# Altium PCB PCB1.PcbDoc
Units mil, origin at the board's own origin, x right, y up, seen from the top; angles counter-clockwise.
Board outline 2644.64 x 2644.64 mil, 2 copper layers (Top Layer, Bottom Layer); 27 components, 25 nets, 160 pads, 18 vias.
Unrouted connection lines stored in the file: 7.
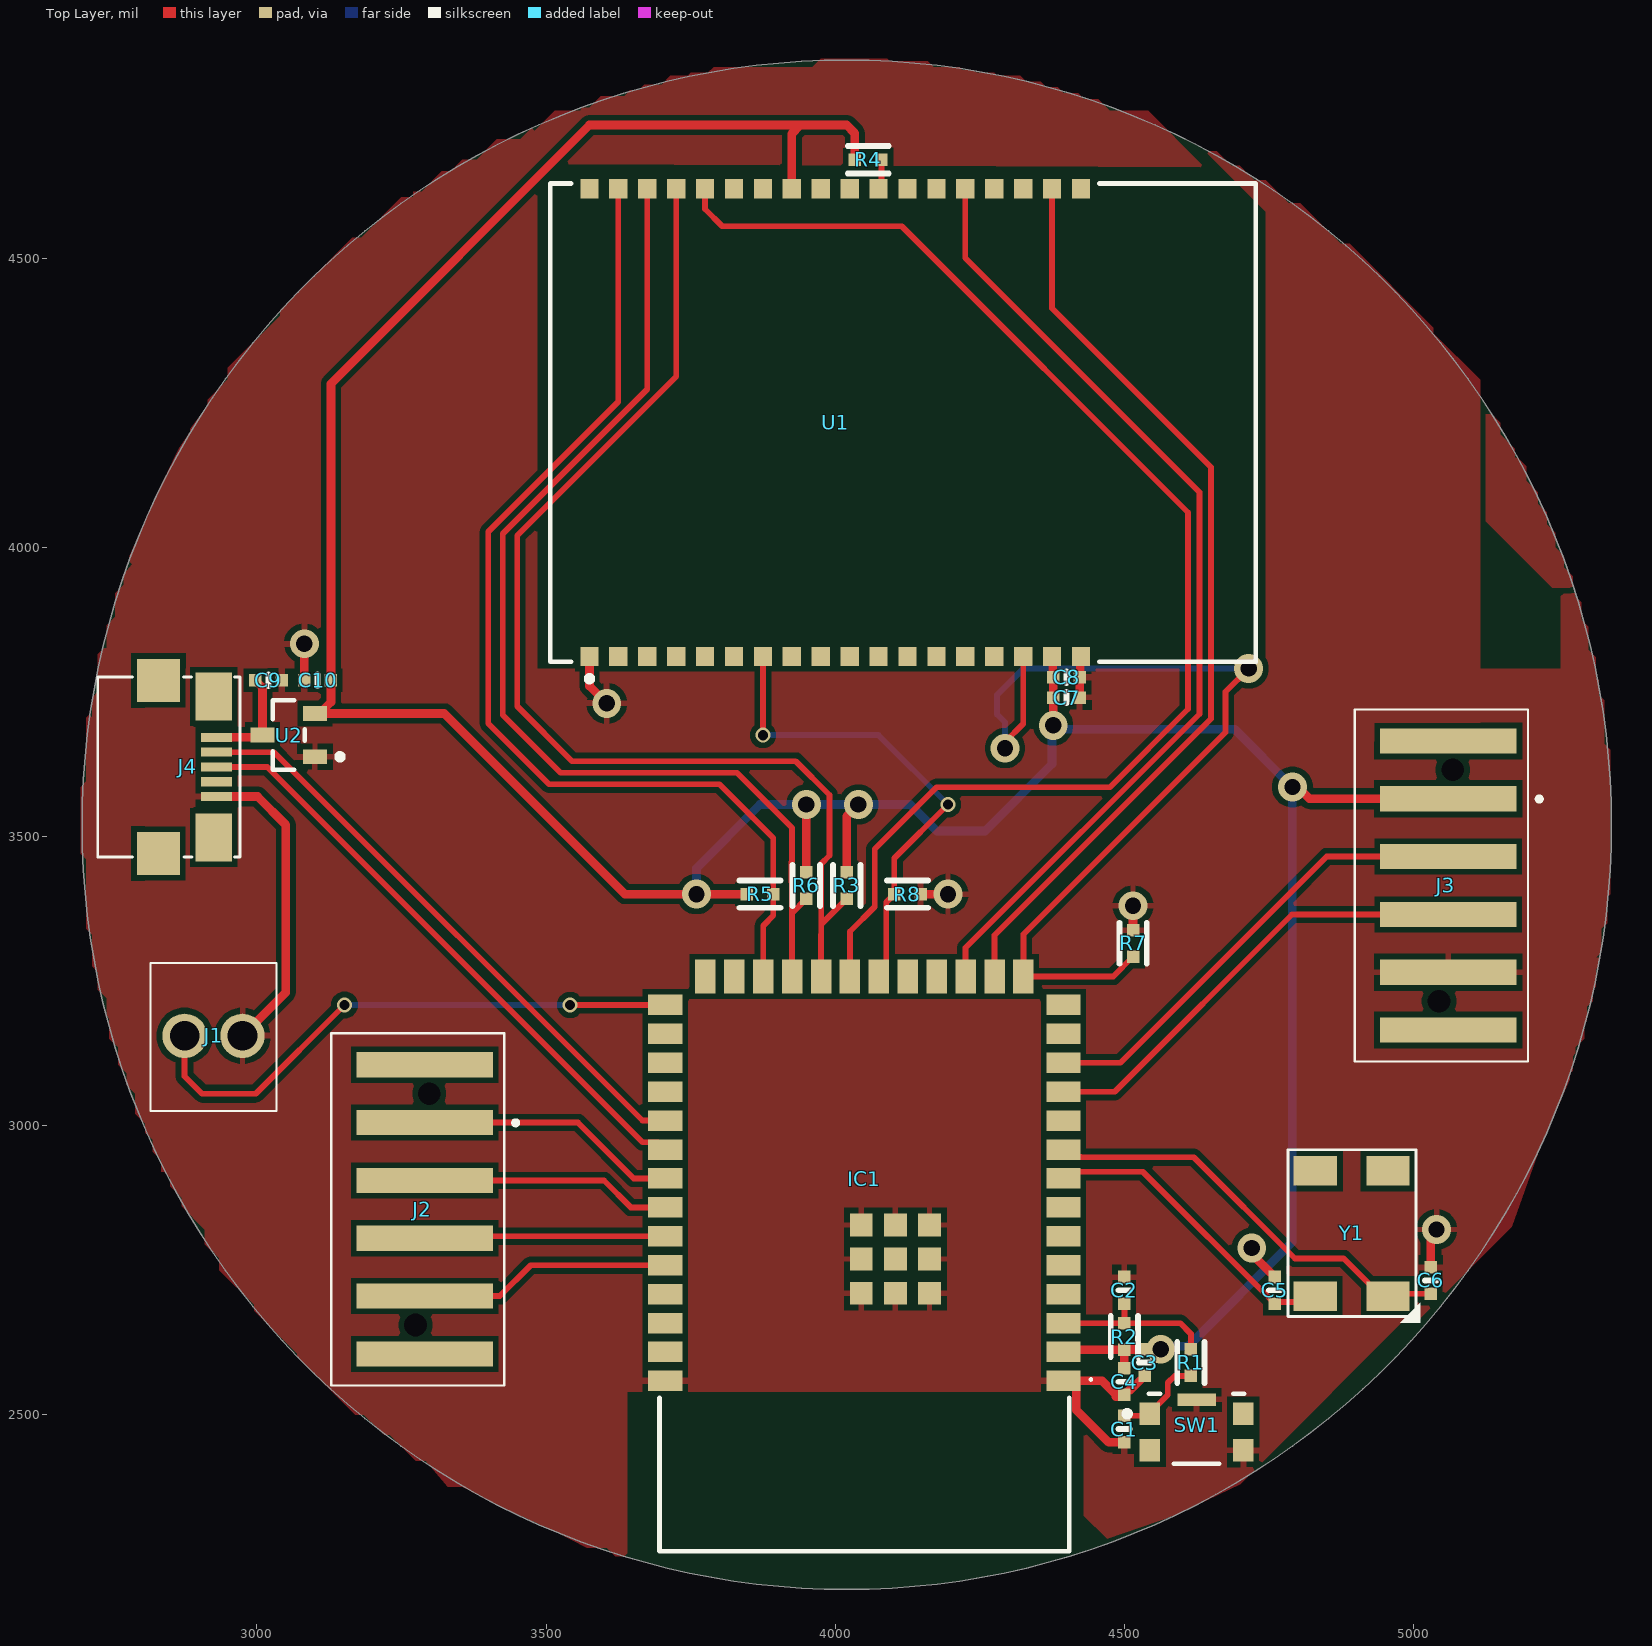
[diagram p0: Top Layer view]
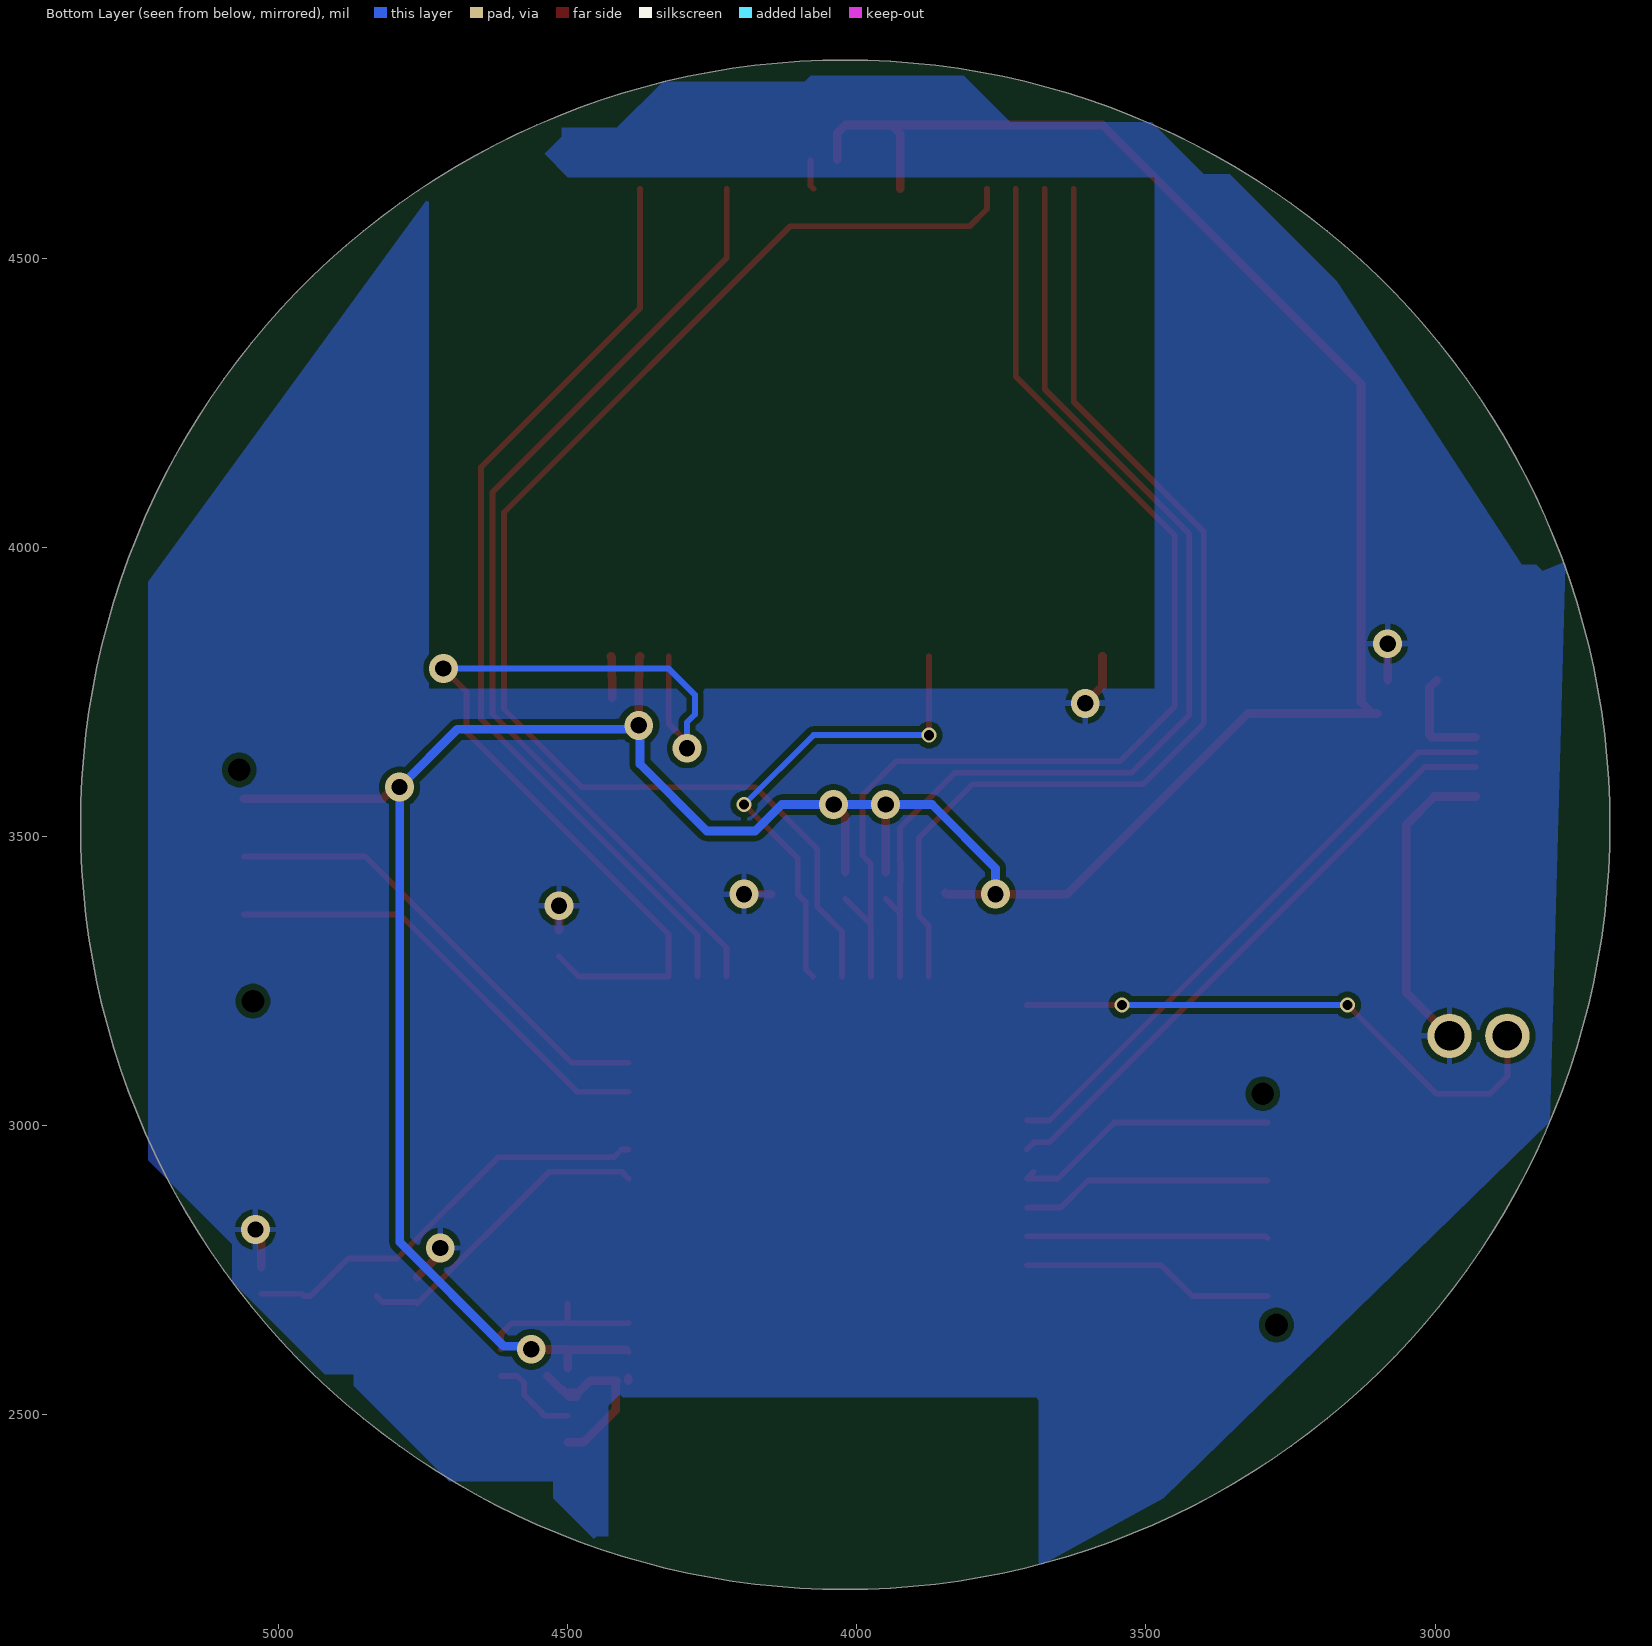
[diagram p1: Bottom Layer view, seen from below]
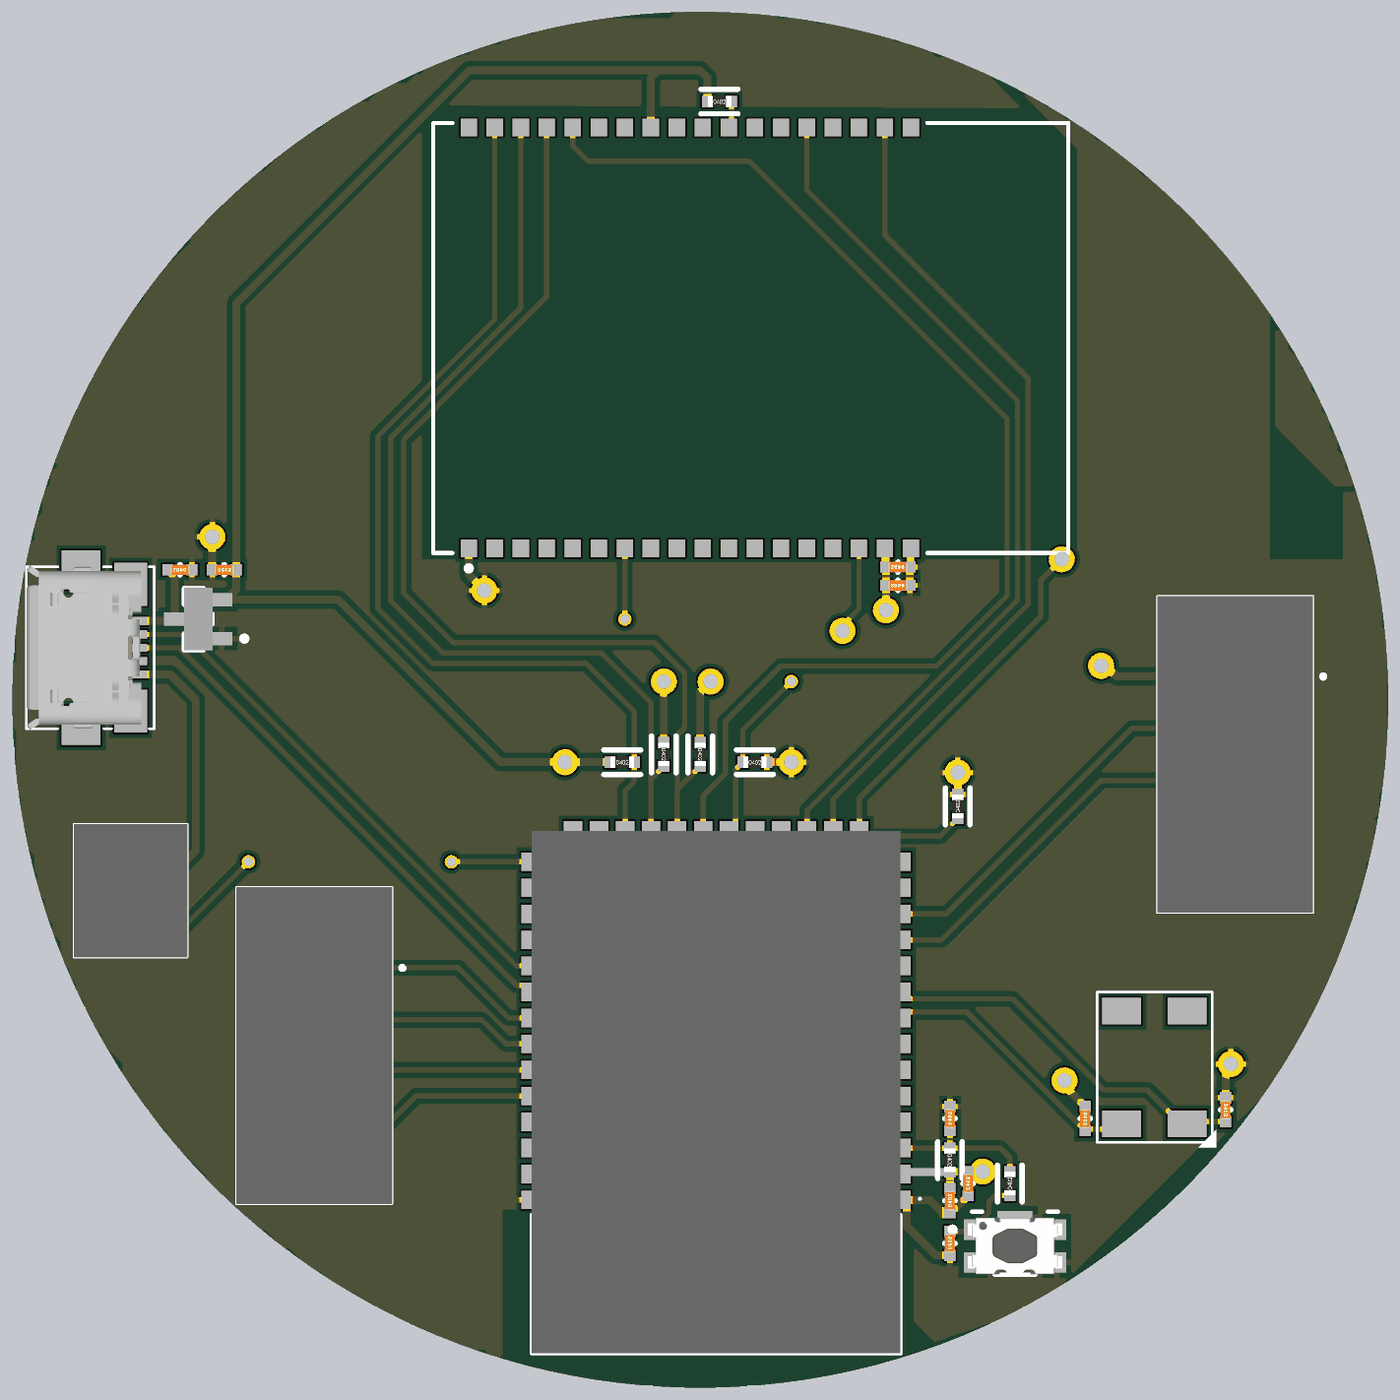
[diagram p2: 3D render of the assembled board from above, using the file's embedded part models]

## Layer stack, top to bottom
Top Solder: solder mask 0.4, Solder Resist, Dk 3.5
Top Layer: signal copper 1.4
Dielectric 1: dielectric 12.6, FR-4, Dk 4.8
Bottom Layer: signal copper 1.4
Bottom Solder: solder mask 0.4, Solder Resist, Dk 3.5

## Board outline
2697.68,3520 ccw(c4020,3520) 4020,2197.68 ccw(c4020,3520) 5342.32,3520 ccw(c4020,3520) 4020,4842.32 ccw(c4020,3520)

## Design rules (kind name [scope] priority, off if disabled: settings)
Clearance [All] p1: gap=10 ignorepadtopadclearanceinfootprint=TRUE except(0: Arc-Hole Track-Hole SMDPad-Hole THPad-Hole Via-Hole Fill-Hole Poly-Hole Region-Hole Text-Hole)
PolygonConnect [All] p1: connectstyle=Relief reliefconductorwidth=10 reliefentries=4 polygonreliefangle="90 Angle" airgapwidth=10
RoutingVias [All] p1: holewidth=28 width=50 viastyle="Through Hole" minholewidth=9.84 minwidth=17.72 maxholewidth=28 maxwidth=50
SolderMaskExpansion [All] p1: expansion=4 istentingtop=FALSE
Width [All] p1: maxlimit=40 minlimit=6 preferedwidth=10 minimp=50.000000 maximp=50.000000 favimp=50.000000
30 further rules are at their usual default settings.

## Components (designator, comment, footprint, x,y, rotation, side; value= is the part's Value field where it differs from the comment)
C1 "0.10µF" SMD-0402C 4500,2475 r0 top
C2 "0.10µF" SMD-0402C 4500,2715 r0 top
C3 "22uF" SMD-0402C 4535,2590 r0 top value=2200pF
C4 "0.10µF" SMD-0402C 4500,2557 r0 top
C5 "20pF" SMD-0402C 4760,2715 r180 top
C6 "20pF" SMD-0402C 5030,2732 r180 top
C7 "10pF" SMD-0402C 4400,3740 r90 top
C8 "10pF" SMD-0402C 4400,3775 r90 top
C9 "1µF" SMD-0402C 3020,3770 r90 top
C10 "1µF" SMD-0402C 3105,3770 r270 top
IC1 "ESP32-S3-WROOM-2-N32R8V" ESP32S3WROOM2N32R8V 4050.51,2765.51 r180 top
J1 "VN02A1500000G" VN02A1500000G 2875,3155 r0 top
J2 "XW4K-04A1-H1" XW4K04A1H1 3290,2855 r270 top
J3 "XW4K-04A1-H1" XW4K04A1H1 5060,3415 r270 top
J4 "USB MICRO-B" CON_10118192-0001LF_SMD 2880,3620 r270 top (schematic designator J?)
R1 "0.0" SMD-0402-RES 4615,2590 r0 top
R2 "10k" SMD-0402-RES 4500,2635 r180 top
R3 "4.7k" SMD-0402-RES 4020,3415 r180 top
R4 "4.7k" SMD-0402-RES 4057,4670 r270 top
R5 "4.7k" SMD-0402-RES 3870,3400 r270 top
R6 "4.7k" SMD-0402-RES 3950,3415 r180 top
R7 "4.7k" SMD-0402-RES 4515,3315 r0 top
R8 "4.7k" SMD-0402-RES 4125,3400 r270 top
SW1 "KMR231GLFS" FP-KMR231GLFS-MFG 4625,2470 r0 top
U1 "MRF24WG0MA-I/RM" MCHP-MODULE-36_V 4000,4215.47 r90 top
U2 "MCP1799T-3302H/TT" FP-C04-104-MFG 3055,3675 r180 top
Y1 "MC-405 32.7680K-G3" XTAL_125_74X51_SMD 4955.98,2705 r90 top

## Footprints (in the part's own frame and the unit in brackets; to place one, negate y for a bottom-side part, rotate by r counter-clockwise, add the part's x,y. Pads: shape width x height; smd on the part's side, far side on the other; paste and mask are expansions set on the pad)
CON_10118192-0001LF_SMD [mm] "USB2.0 MICRO"
  rect 0.4x1.35 smd: 1(-1.3,1.275) 2(-0.65,1.275) 3(0,1.275) 4(0.65,1.275) 5(1.3,1.275)
  rect 2.1x1.6 smd: 6(-3.1,1.15) 7(3.1,1.15)
  rect 1.9x1.9 smd: 8(-3.8,-1.275) 9(3.8,-1.275)
  silkscreen extent -3.95,-3.94 3.95,2.3, body extent -4.04,-3.94 4.04,1.66, height 2.81
ESP32S3WROOM2N32R8V [mm]
  rect 1.5x0.9 smd: 1(-8.75,5.26) 2(-8.75,3.99) 3(-8.75,2.72) 4(-8.75,1.45) 5(-8.75,0.18) 6(-8.75,-1.09) 7(-8.75,-2.36) 8(-8.75,-3.63) 9(-8.75,-4.9) 10(-8.75,-6.17) 11(-8.75,-7.44) 12(-8.75,-8.71) 13(-8.75,-9.98) 14(-8.75,-11.25) 27(8.75,-11.25) 28(8.75,-9.98) 29(8.75,-8.71) 30(8.75,-7.44) 31(8.75,-6.17) 32(8.75,-4.9) 33(8.75,-3.63) 34(8.75,-2.36) 35(8.75,-1.09) 36(8.75,0.18) 37(8.75,1.45) 38(8.75,2.72) 39(8.75,3.99) 40(8.75,5.26)
  rect 0.9x1.5 smd: 15(-6.985,-12.5) 16(-5.715,-12.5) 17(-4.445,-12.5) 18(-3.175,-12.5) 19(-1.905,-12.5) 20(-0.635,-12.5) 21(0.635,-12.5) 22(1.905,-12.5) 23(3.175,-12.5) 24(4.445,-12.5) 25(5.715,-12.5) 26(6.985,-12.5)
  rect 1x1 smd: 41(-1.36,-0.09) 42(-1.36,1.41) 43(-2.86,1.41) 44(-2.86,-0.09) 45(-2.86,-1.59) 46(-1.36,-1.59) 47(0.14,-1.59) 48(0.14,-0.09) 49(0.14,1.41)
  silkscreen extent -10,5.15 9,12.75, body extent -9,-12.75 9,12.75, height 3.35
FP-C04-104-MFG [mm]
  rect 1.05x0.65 smd paste+0 mask+0: 1(-1.15,0.95) 2(-1.15,-0.95) 3(1.15,0)
  silkscreen extent -2.38,-1.53 0.7,1.52, body extent -1.78,-1.88 1.77,1.88, height 0.25
FP-KMR231GLFS-MFG [mm]
  rect 0.9x1 smd paste+0 mask+0: 1(-2.05,0.8) 2(2.05,0.8) 3(-2.05,-0.8) 4(2.05,-0.8)
  rect 1.7x0.55 smd paste+0 mask+0: 5(0,1.425)
  silkscreen extent -3.17,-1.4 2.1,1.68, body extent -2.6,-1.5 2.6,1.8, height 0.25
MCHP-MODULE-36_V [mm] "Module, 36-Leads, Body 31x21mm, Pitch 1.27mm"
  rect 0.85x0.8 smd: 1(-10.275,10.795) 2(-10.275,9.525) 3(-10.275,8.255) 4(-10.275,6.985) 5(-10.275,5.715) 6(-10.275,4.445) 7(-10.275,3.175) 8(-10.275,1.905) 9(-10.275,0.635) 10(-10.275,-0.635) 11(-10.275,-1.905) 12(-10.275,-3.175) 13(-10.275,-4.445) 14(-10.275,-5.715) 15(-10.275,-6.985) 16(-10.275,-8.255) 17(-10.275,-9.525) 18(-10.275,-10.795) 19(10.275,-10.795) 20(10.275,-9.525) 21(10.275,-8.255) 22(10.275,-6.985) 23(10.275,-5.715) 24(10.275,-4.445) 25(10.275,-3.175) 26(10.275,-1.905) 27(10.275,-0.635) 28(10.275,0.635) 29(10.275,1.905) 30(10.275,3.175) 31(10.275,4.445) 32(10.275,5.715) 33(10.275,6.985) 34(10.275,8.255) 35(10.275,9.525) 36(10.275,10.795)
  silkscreen extent -11.37,-18.47 10.5,12.52, body extent -10.5,-18.47 10.5,12.52, height 2.7
SMD-0402-RES [mm]
  rect 0.55x0.55 smd: 1(0,0.584) 2(0,-0.584)
  silkscreen extent -0.6,-0.9 0.6,0.9, body extent -0.28,-0.57 0.27,0.58, height 0.41
SMD-0402C [mm]
  rect 0.55x0.55 smd: 1(0,0.584) 2(0,-0.584)
  silkscreen extent -0.25,0 0.25,0, body extent -0.25,-0.51 0.25,0.51, height 0.51
VN02A1500000G [mm]
  round 1.95 hole 1.3: 1(0,0) 2(2.54,0)
  silkscreen extent -1.5,-3.3 4.04,3.2, body extent -1.5,-3.3 4.04,3.2, height 8.6
XTAL_125_74X51_SMD [mm]
  rect 1.3x1.9 smd: 1(0,0) 2(5.5,0) 3(5.5,3.2) 4(0,3.2)
  silkscreen extent -1.17,-1.42 6.43,4.39, body extent -0.9,-1.22 6.43,4.39, height 2.54
XW4K04A1H1 [mm]
  rect 1.1x6 smd: 1(-3.81,0) 2(-1.27,0) 3(1.27,0) 4(3.81,0) MP1(-6.35,0) MP2(6.35,0)
  round 0.5 hole 1 unplated: MB1(-5.08,0.2) MB2(5.08,-0.4)
  silkscreen extent -7.74,-4.1 7.74,4.1, body extent -7.74,-4.1 7.74,3.5, height 5.1

## Part data
C1 C2 C4: library part GRM152C80J104ME19D, "CAP CER 0.1UF 6.3V X6S 0402", Digi-Key Part Number=490-9998-1-ND, Manufacturer="Murata Electronics North America", Operating Temperature="-55°C ~ 105°C", Package / Case="0402 (1005 Metric)", Ratings=-, Temperature Coefficient=X6S, Tolerance=±20%, Voltage=6.3V, @ qty=0, Applications="General Purpose", Datasheets=http://www.murata.com/~/media/webrenewal/support/library/catalog/products/capacitor/mlcc/c02e.pdf, Factory Stock=0, Features="Derating Recommended", Height - Seated (Max)=-, Image=//media.digikey.com/Renders/Murata%20Renders/ZRB-SERIES-0402.jpg, Lead Spacing=-, Lead Style=-, Minimum Quantity=1, Mounting Type="Surface Mount, MLCC", Packaging="Cut Tape (CT)", Part Number=GRM152C80J104ME19D, Part Status=Active, Quantity Available=19095, Series=GRM, Size / Dimension="0.039\" L x 0.020\" W (1.00mm x 0.50mm)", Thickness (Max)="0.009\" (0.22mm)", Unit Price (USD)=0.15
C3: library part GCM155R71H222KA37D, "CAP CER 2200PF 50V X7R 0402", Digi-Key Part Number=490-4914-1-ND, Manufacturer="Murata Electronics North America", Operating Temperature="-55°C ~ 125°C", Package / Case="0402 (1005 Metric)", Ratings=AEC-Q200, Temperature Coefficient=X7R, Tolerance=±10%, Voltage=50V, @ qty=0, Applications=Automotive, Datasheets=http://www.murata.com/~/media/webrenewal/support/library/catalog/products/capacitor/mlcc/c03e.ashx, Factory Stock=0, Features=-, Height - Seated (Max)=-, Image=//media.digikey.com/Renders/Murata%20Renders/ZRB-SERIES-0402.jpg, Lead Spacing=-, Lead Style=-, Minimum Quantity=1, Mounting Type="Surface Mount, MLCC", Packaging="Cut Tape (CT)", Part Number=GCM155R71H222KA37D, Part Status=Active, Quantity Available=56459, Series=GCM, Size / Dimension="0.039\" L x 0.020\" W (1.00mm x 0.50mm)", Thickness (Max)="0.022\" (0.55mm)", Unit Price (USD)=0.1
C5 C6: library part GRM1555C1E200JA01D, "CAP CER 20PF 25V NP0 0402", Digi-Key Part Number=490-11364-1-ND, Manufacturer="Murata Electronics North America", Operating Temperature="-55°C ~ 125°C", Package / Case="0402 (1005 Metric)", Ratings=-, Temperature Coefficient="C0G, NP0", Tolerance=±5%, Voltage=25V, @ qty=0, Applications="General Purpose", Datasheets=http://www.murata.com/~/media/webrenewal/support/library/catalog/products/capacitor/mlcc/c02e.pdf, Factory Stock=0, Features=-, Height - Seated (Max)=-, Image=//media.digikey.com/Renders/Murata%20Renders/ZRB-SERIES-0402.jpg, Lead Spacing=-, Lead Style=-, Minimum Quantity=1, Mounting Type="Surface Mount, MLCC", Packaging="Cut Tape (CT)", Part Number=GRM1555C1E200JA01D, Part Status=Active, Quantity Available=18664, Series=GRM, Size / Dimension="0.039\" L x 0.020\" W (1.00mm x 0.50mm)", Thickness (Max)="0.022\" (0.55mm)", Unit Price (USD)=0.1
C7 C8: library part GJM1555C1H100GB01D, "CAP CER 10PF 50V NP0 0402", Digi-Key Part Number=490-8077-1-ND, Manufacturer="Murata Electronics North America", Operating Temperature="-55°C ~ 125°C", Package / Case="0402 (1005 Metric)", Ratings=-, Temperature Coefficient="C0G, NP0", Tolerance=±2%, Voltage=50V, @ qty=0, Applications="RF, Microwave, High Frequency", Datasheets=http://www.murata.com/~/media/webrenewal/support/library/catalog/products/capacitor/mlcc/c02e.pdf, Factory Stock=0, Features="High Q, Low Loss", Height - Seated (Max)=-, Image=//media.digikey.com/Renders/Murata%20Renders/ZRB-SERIES-0402.jpg, Lead Spacing=-, Lead Style=-, Minimum Quantity=1, Mounting Type="Surface Mount, MLCC", Packaging="Cut Tape (CT)", Part Number=GJM1555C1H100GB01D, Part Status=Active, Quantity Available=54586, Series=GJM, Size / Dimension="0.039\" L x 0.020\" W (1.00mm x 0.50mm)", Thickness (Max)="0.022\" (0.55mm)", Unit Price (USD)=0.18
C9 C10: library part GRM155C81E105KE11D, "CAP CER 1UF 25V X6S 0402", Digi-Key Part Number=490-10014-1-ND, Manufacturer="Murata Electronics North America", Operating Temperature="-55°C ~ 105°C", Package / Case="0402 (1005 Metric)", Ratings=-, Temperature Coefficient=X6S, Tolerance=±10%, Voltage=25V, @ qty=0, Applications="General Purpose", Datasheets=http://www.murata.com/~/media/webrenewal/support/library/catalog/products/capacitor/mlcc/c02e.pdf, Factory Stock=0, Features="Derating Recommended", Height - Seated (Max)=-, Image=//media.digikey.com/Renders/Murata%20Renders/ZRB-SERIES-0402.jpg, Lead Spacing=-, Lead Style=-, Minimum Quantity=1, Mounting Type="Surface Mount, MLCC", Packaging="Cut Tape (CT)", Part Number=GRM155C81E105KE11D, Part Status=Active, Quantity Available=85432, Series=GRM, Size / Dimension="0.039\" L x 0.020\" W (1.00mm x 0.50mm)", Thickness (Max)="0.022\" (0.55mm)", Unit Price (USD)=0.29
IC1: "Integrated Circuit", Manufacturer_Name="Espressif Systems", Mouser Part Number=356-ESP3S3WRM2N32R8V, Datasheet Link=https://www.espressif.com/sites/default/files/documentation/esp32-s3-wroom-2_datasheet_en.pdf, Height=3.25mm, Manufacturer_Part_Number=ESP32-S3-WROOM-2-N32R8V, Mouser Price/Stock=https://www.mouser.co.uk/ProductDetail/Espressif-Systems/ESP32-S3-WROOM-2-N32R8V?qs=Li%252BoUPsLEntC3FaT%2FvCeug%3D%3D
J1: "Connector", Manufacturer_Name=Amphenol, Mouser Part Number=649-VN02A15000J0G, Arrow Part Number=VN02A1500000G, Arrow Price/Stock=https://www.arrow.com/en/products/vn02a1500000g/amphenol?region=nac, Datasheet Link=https://www.mouser.com/datasheet/2/18/9COuFx9FNOAv-1379191.pdf, Height=8.5mm, Manufacturer_Part_Number=VN02A1500000G, Mouser Price/Stock=https://www.mouser.co.uk/ProductDetail/Amphenol-Anytek/VN02A1500000G?qs=Mv7BduZupUgf8d3Xo6xdxw%3D%3D
J2 J3: "Connector", Manufacturer_Name="Omron Electronics", Mouser Part Number=653-XW4K04A1H1, Datasheet Link=http://omronfs.omron.com/en_US/ecb/products/pdf/en_xw4h_k_l.pdf, Height=5mm, Manufacturer_Part_Number=XW4K-04A1-H1, Mouser Price/Stock=https://www.mouser.co.uk/ProductDetail/Omron-Electronics/XW4K-04A1-H1?qs=wYonFgBYHKkbSWPseQWu%252BA%3D%3D
J4: library part CON_USB2.0_MICROB-SMD, "USB - micro B USB 2.0 Receptacle Connector 5 Position Surface Mount, Right Angle", Alternate Part Number-1=NA, Case/Package="USB MICRO-B SMD", Manufacturer=ICC, Manufacturer Part Number=10118192-0001LF, Supplier Part Number-1="MICRO USB", Supplier-1=SUNROM
R1: library part ERJ-2GE0R00X, "RES SMD 0.0OHM JUMPER 1/10W 0402", Digi-Key Part Number=P0.0JCT-ND, Manufacturer="Panasonic Electronic Components", Operating Temperature="-55°C ~ 155°C", Package / Case="0402 (1005 Metric)", Power (Watts)="0.1W, 1/10W", Supplier Device Package=0402, Temperature Coefficient=-, Tolerance=Jumper, @ qty=1500, Composition="Thick Film", Datasheets=http://industrial.panasonic.com/www-cgi/jvcr13pz.cgi?E+PZ+3+AOA0001+ERJ2GE0R00X+7+WW, Factory Stock=0, Failure Rate=-, Features="Automotive AEC-Q200", Height - Seated (Max)="0.016\" (0.40mm)", Image=//media.digikey.com/Photos/Panasonic%20Photos/ERJ-PA2-Series.jpg, Minimum Quantity=1, Number of Terminations=2, Packaging="Cut Tape (CT)", Part Number=ERJ-2GE0R00X, Part Status=Active, Quantity Available=3152483, Series=ERJ, Size / Dimension="0.039\" L x 0.020\" W (1.00mm x 0.50mm)", Unit Price (USD)=0.00384
R2: library part ERJ-2GEJ103X, "RES SMD 10K OHM 5% 1/10W 0402", Digi-Key Part Number=P10KJCT-ND, Manufacturer="Panasonic Electronic Components", Operating Temperature="-55°C ~ 155°C", Package / Case="0402 (1005 Metric)", Power (Watts)="0.1W, 1/10W", Supplier Device Package=0402, Temperature Coefficient=±200ppm/°C, Tolerance=±5%, @ qty=1500, Composition="Thick Film", Datasheets=http://industrial.panasonic.com/www-cgi/jvcr13pz.cgi?E+PZ+3+AOA0001+ERJ2GEJ103X+7+WW, Factory Stock=0, Failure Rate=-, Features="Automotive AEC-Q200", Height - Seated (Max)="0.016\" (0.40mm)", Image=//media.digikey.com/Photos/Panasonic%20Photos/ERJ-PA2-Series.jpg, Minimum Quantity=1, Number of Terminations=2, Packaging="Cut Tape (CT)", Part Number=ERJ-2GEJ103X, Part Status=Active, Quantity Available=2560215, Series=ERJ, Size / Dimension="0.039\" L x 0.020\" W (1.00mm x 0.50mm)", Unit Price (USD)=0.00350
R3 R4 R5 R6 R7 R8: library part ERJ-2GEJ472X, "RES SMD 4.7K OHM 5% 1/10W 0402", Digi-Key Part Number=P4.7KJCT-ND, Manufacturer="Panasonic Electronic Components", Operating Temperature="-55°C ~ 155°C", Package / Case="0402 (1005 Metric)", Power (Watts)="0.1W, 1/10W", Supplier Device Package=0402, Temperature Coefficient=±200ppm/°C, Tolerance=±5%, @ qty=1500, Composition="Thick Film", Datasheets=http://industrial.panasonic.com/www-cgi/jvcr13pz.cgi?E+PZ+3+AOA0001+ERJ2GEJ472X+7+WW, Factory Stock=0, Failure Rate=-, Features="Automotive AEC-Q200", Height - Seated (Max)="0.016\" (0.40mm)", Image=//media.digikey.com/Photos/Panasonic%20Photos/ERJ-PA2-Series.jpg, Minimum Quantity=1, Number of Terminations=2, Packaging="Cut Tape (CT)", Part Number=ERJ-2GEJ472X, Part Status=Active, Quantity Available=8551774, Series=ERJ, Size / Dimension="0.039\" L x 0.020\" W (1.00mm x 0.50mm)", Unit Price (USD)=0.00350
SW1: library part CMP-2000-06516-3, "SWITCH TACTILE SPST-NO 0.05A 32V", Case/Package=SMD/SMT, Contact Current Rating=50mA, Contact Resistance=100mR, Insulation Resistance=1GR, Max Operating Temperature=85°C, Max Voltage Rating (DC)=32V, Min Operating Temperature=-40°C, Operating Force=3N, Package Quantity=7000, Power Rating=1W, Actuator Length=0.5mm, Actuator Type=Standard, Contact Material=Silver, Contact Plating=Silver, Current Rating=50mA, Depth=4.6mm, Illumination Type=Non-Illuminated, Lead Free="Lead Free", Length=4.6mm, Max Current Rating=50mA, Mechanical Life=150000Cycles, Mount="Surface Mount", Orientation=Straight, Packaging="Cut Tape", Radiation Hardening=No, REACH SVHC="No SVHC", Series=KMR2, Switch Function=Off-Mom, Switch Travel=0.25mm, Termination="Gull Wing", Throw Configuration=SPST, Voltage Rating (DC)=32V, Width=2.8mm
U1: library part CMP-0191-00102-1, "IEEE 802.11-Compliant RF Transceiver, 2.8 to 3.6 V, -40 to 85 degC, 36-Pin Module, RoHS, Tray", Temperature Max="85 degC", Temperature Min="-40 degC", ComponentLink1Description="Manufacturer URL", ComponentLink1URL=http://www.microchip.com/, ComponentLink2Description=Datasheet, ComponentLink2URL=http://ww1.microchip.com/downloads/en/DeviceDoc/70686B.pdf, DatasheetVersion="Rev. B", Mounting Technology="Surface Mount", PackageDescription="36-Pin Module, Body 31 x 21 mm, Pitch 1.27 mm", Packing=Tray, PartNumber=MRF24WG0MA-I/RM, RoHS=TRUE, VDD Max="3.6 V", VDD Min="2.8 V"
U2: library part CMP-06324-000112-1, "IC REG LINEAR 3.3V 80MA SOT23-3"
Y1: library part "XTAL_32.768K-MC-405 32.7680K-G3", "32.768kHz ±100ppm Crystal 20pF 50 kOhms 4-SOJ, 5.50mm pitch", Alternate Part Number-1="MC-405 32.7680K-AC0: ROHS", Case/Package=4-SOJ, Manufacturer=EPSON, Supplier Part Number-1=732-MC405327680KG3RS, Manufacturer Part Number="MC-405 32.7680K-G3", Supplier-1=Mouser

## Via types
v1: diameter 50, hole 28, Top Layer to Bottom Layer, 14 vias
v2: diameter 25.59, hole 17.72, Top Layer to Bottom Layer, 4 vias

## Nets (pads, with @x,y where several pads share a name; then routed paths per layer and width w, separated by ;. In a path a pad name is that pad's centre, name@x,y a point inside that pad or via, vN(x,y) a via of type N, cw(c..) or ccw(c..) an arc to the next point about the centre after c; other vN are vias at no path point)
3.3V: C3.1 C4.1 C7.1 C8.1 C10.1 IC1.2 J3.1 R2.1 R3.2 R4.2 R5.2 R6.2 U1.17 U1.29 U2.2 | length 5929
  Top Layer w10: IC1.2 IC1.2@4398.57,2612
  Top Layer w15: U2.2 U2.2@3108.15,3712.4 ; R5.2@3846.83,3402.26 3844.57,3400 v1(3760,3400) 3636.42,3400 3324.02,3712.4 U2.2@3108.15,3712.4 ; U1.29 3925,4715 3940,4730 ; R6.2 v1(3950,3555) ; R3.2 4020,3535 v1(4040,3555) ; R4.2 4034,4716 4020,4730 3940,4730 ; U1.17 4376,3809.95 4376,3776 C8.1 C7.1 v1(4377,3692) ; IC1.2@4398.57,2612 R2.1 ; C4.1 R2.1 ; v1(4563,2613) C3.1 4534.5,2612.5 4500.5,2612.5 R2.1 ; v1(4790.5,3585.24) 4799.97,3585.24 4820.2,3565 J3.1 ; U2.2@3108.15,3712.4 3128,3732.25 C10.1 3128,4282.77 3575.23,4730 3940,4730
  Bottom Layer w15: v1(3760,3400) 3760,3445 3870,3555 v1(3950,3555) v1(4040,3555) 4130,3555 4175.63,3509.37 4259.37,3509.37 4375,3625 v1@4375,3676.23 ; v1(4377,3692) 4383.7,3685.3 4414.72,3685.3 4415,3685.02 4690.71,3685.02 v1(4790.5,3585.24) 4790.5,2798.39 4610.5,2618.4 4568.4,2618.4 v1(4563,2613)
!CS: IC1.17 U1.23 | length 1697.7
  Top Layer w10: U1.23 4225,4500 4630,4095 4630,3711.72 4225.51,3307.23 IC1.17
!RST: IC1.20 R8.2 U1.7 | length 852.5
  Top Layer w10: v2(3875,3675) U1.7 ; IC1.20 4088.23,3270.35 4088.23,3386.23 R8.2 4102,3462 v2(4195,3555)
  Bottom Layer w10: v2(3875,3675) 4075,3675 v2(4195,3555)
!WP: IC1.15 R7.2 U1.16 | length 1620.9
  Top Layer w10: v1(4293.51,3652.39) 4293.51,3663.21 4325,3694.7 U1.16 ; R7.2 4480.64,3257.64 IC1.15 4325.51,3330.51 4675,3680 4675,3750 v1(4715,3790)
  Bottom Layer w10: v1(4293.51,3652.39) 4293.51,3697.35 4280,3710.86 4280,3745 4325,3790 v1(4715,3790)
EN: C2.2 IC1.3 R1.1 R2.2 | length 288.6
  Top Layer w10: IC1.3 4395.43,2658 R2.2 ; C2.2 R2.2 ; R1.1 4615,2640 4597,2658 R2.2
GND: C1.2 C2.1 C3.2 C4.2 C5.2 C6.2 C7.2 C8.2 C9.2 C10.2 IC1.1 IC1.40 IC1.41 IC1.42 IC1.43 IC1.44 IC1.45 IC1.46 IC1.47 IC1.48 IC1.49 J1.2 J3.4 J4.5 R7.1 R8.1 SW1.4 SW1.5 U1.1 U1.10 U1.18 U1.19 U1.25 U1.28 U1.30 U1.36 U2.1 | length 1313.5
  Top Layer w15: J4.5 3001.18,3568.82 3050,3520 3050,3230 J1.2 ; C10.2 v1(3082,3833) ; U1.1 3575,3760 v1(3605,3730) ; R8.1 v1(4195,3400) ; IC1.1 IC1.1@4395,2563.43 ; C7.2 C8.2 4424,3776 4424,3809.95 U1.18 ; 4485.67,2530.67 4496.67,2530.67 C4.2 ; C1.2 4473,2452 4417.03,2507.97 4417.03,2556.4 4415,2558.43 4461.21,2558.43 4482.31,2537.33 4496.67,2537.33 C4.2 ; R7.1 v1(4515,3380) ; C3.2 4510.46,2542.46 4508.46,2542.46 C4.2 ; v1@4718.57,2790 v1(4720.28,2788.28) 4726.98,2781.59 4726.98,2771.02 C5.2 ; C6.2 5030,2810 v1(5040,2820)
HIB: IC1.16 U1.20 | length 1631.4
  Top Layer w10: IC1.16 4275.51,3328.94 4650,3703.43 4650,4138.28 4375,4413.28 U1.20
INT1: IC1.22 R3.1 U1.33 | length 1994.9
  Top Layer w10: U1.33 3725,4295 3450,4020 3450,3725 3545,3630 3931.57,3630 3990,3571.57 3990,3466.78 3975.83,3452.61 3975.83,3347.83 ; IC1.22 3975.51,3330 3975.83,3330.32 3975.83,3347.83 ; R3.1 3975.83,3347.83
IO0: IC1.27 J1.1 | length 977
  Top Layer w10: J1.1 2875,3085 2905,3055 2998.15,3055 v2(3151.57,3208.43) ; v2(3541.57,3208.43) IC1.27
  Bottom Layer w10: v2(3151.57,3208.43) v2(3541.57,3208.43)
NetC1_1: C1.1 R1.2 SW1.1 | length 156.9
  Top Layer w10: C1.1 4540.8,2498 SW1.1 4544.29,2503.46 4575,2534.17 4575,2555 4587,2567 R1.2
NetC5_1: C5.1 IC1.8 Y1.4 | length 538.4
  Top Layer w10: IC1.8 4406.57,2920 4532,2920 C5.1 ; C5.1@4760,2695 4820,2695 Y1.4
NetC6_1: C6.1 IC1.9 Y1.1 | length 741.6
  Top Layer w10: IC1.9 4406.81,2958.43 4419.53,2945.71 4424.68,2945.71 4425.39,2945 4620.14,2945 4795.14,2770 4879.17,2770 4944.17,2705 Y1.1 4959.98,2709 C6.1
NetR4_1: R4.1 U1.26 | length 52.1
  Top Layer w10: U1.26 4080,4625 R4.1
RX: IC1.11 J3.3 | length 792
  Top Layer w10: IC1.11 4483.43,3058.43 4790,3365 J3.3
SCK1: IC1.23 R6.1 U1.34 | length 1887.6
  Top Layer w10: U1.34 3675,4273.28 3425,4023.28 3425,3710 3525,3610 3830,3610 3925.51,3514.49 3925.51,3456.38 3924.17,3455.04 3924.17,3420.96 3925.51,3419.62 3925.51,3367.51 ; IC1.23 3925.51,3367.51 ; R6.1 3925.51,3367.51
SDI1: IC1.24 R5.1 U1.35 | length 1839.8
  Top Layer w10: U1.35 3625,4251.57 3400,4026.57 3400,3695 3505,3590 3800,3590 3893,3497 R5.1 3893,3363 3875.51,3345.51 IC1.24
SDO1: IC1.21 U1.32 | length 2307.8
  Top Layer w10: U1.32 3775,4584.76 3804.76,4555 4115,4555 4610,4060 4610,3720 4475,3585 4175,3585 4068.23,3478.23 4068.23,3378.23 4025.51,3335.51 IC1.21
TCK: IC1.36 J2.4 | length 438.2
  Top Layer w10: J2.4 3420,2705 3473.43,2758.43 IC1.36
TDI: IC1.34 J2.2 | length 435.3
  Top Layer w10: J2.2 3600,2905 3646.57,2858.43 IC1.34
TDO: IC1.35 J2.3 | length 417.4
  Top Layer w10: J2.3 3293.43,2808.43 IC1.35
TMS: IC1.33 J2.1 | length 472.4
  Top Layer w10: J2.1 3555,3005 3651.57,2908.43 IC1.33 IC1.33@3694.45,2920
TX: IC1.12 J3.2 | length 812.7
  Top Layer w10: IC1.12 4493.43,3108.43 4850,3465 J3.2
USB_D+: IC1.32 J4.3 | length 1049.9
  Top Layer w10: J4.3 3017.98,3620 3666.84,2971.14 3693.31,2971.14 IC1.32
USB_D-: IC1.31 J4.2 | length 1039.7
  Top Layer w10: J4.2 3029.41,3645.59 3666.57,3008.43 IC1.31
VCC: C9.1 J4.1 U2.3 | length 181.4
  Top Layer w15: J4.1 2930.57,3671.55 3006.28,3671.55 U2.3 3009.72,3757.28 C9.1
pads on no net: IC1.4 IC1.5 IC1.6 IC1.7 IC1.10 IC1.13 IC1.14 IC1.18 IC1.19 IC1.25 IC1.26 IC1.28 IC1.29 IC1.30 IC1.37 IC1.38 IC1.39 J2.MB1 J2.MB2 J2.MP1 J2.MP2 J3.MB1 J3.MB2 J3.MP1 J3.MP2 J4.4 J4.6 J4.7 J4.8 J4.9 SW1.2 SW1.3 U1.2 U1.3 U1.4 U1.5 U1.6 U1.8 U1.9 U1.11 U1.12 U1.13 U1.14 U1.15 U1.21 U1.22 U1.24 U1.27 U1.31 Y1.2 Y1.3

## Polygon pours and split planes (outlines as drawn)
GND on Top Layer "GND_L01_P007" (solid, pour order 7): 2770,3953.63 2770,3935 2755,3920 2755,3880 2740,3865 2740,3825 2735,3825 2725,3815 2725,3750 2715,3740 2715,3705 2710,3710 2705,3705 2705,3595 2695,3585 2695,3470 2705,3460 2705,3340 2715,3330 2715,3275 2725,3265 2725,3235 2740,3220 2740,3190 2745,3185 2745,3150 2760,3135 2760,3105 2775,3090 2775,3070 2790,3055 2790,3020 2807.18,3002.82 2807.18,2987.82 2820,2975 2820,2955 2835,2940 2835,2920 2840,2920 2850,2910 2850,2895 2870,2875 2870,2860 2905,2825 2910,2820 2910,2795 2935,2770 2935,2750 2995,2690 2995,2680 3070,2605 3070,2600 3170,2500 3185,2500 3220,2465 3230,2465 3275,2420 3315,2420 3315,3670 2890,4095 2784.68,3989.68 2784.68,3970.32
GND on Top Layer "GND_L01_P006" (solid, pour order 6): 2780,3985 2824.56,4085.21 2865,4170 2885,4200 2885,4205 2915,4245 2915,4250 2915,4255 2950,4290 2950,4310 3040,4400 3040,4410 3165,4535 3180,4535 3250,4605 3270,4605 3270,4615 3285,4615 3320,4650 3335,4650 3355,4670 3380,4670 3415,4705 3455,4705 3475,4725 3480,4720 3485,4720 3485,3641.62 2911.06,3843.94 2779.36,3975.64 2778.87,3975.64
GND on Top Layer "GND_L01_P005" (solid, pour order 5): 5250,3915 5255,3920 5280,3920 5280,3915 5290,3905 5290,3875 5302.43,3862.57 5302.43,3822.57 5315,3810 5315,3775 5320,3770 5320,3745 5330,3735 5330,3660 5340,3650 5340,3400 5335,3395 5335,3350 5325,3340 5325,3300 5315,3290 5320,3290 5320,3275 5315,3270 5315,3240 5310,3235 5310,3215 5300,3205 5300,3180 5295,3175 5295,3150 5280,3135 5280,3125 5275,3120 5275,3095 5270,3090 5260,3100 5255,3100 5255,3915 5270,3930
no net on Top Layer "NONET_L01_P004" (solid, pour order 4): 5095,4289.69 5115,4269.69 5115,4255 5130,4240 5130,4230 5135,4230 5150,4215 5150,4195 5175,4170 5175,4155 5180,4155 5195,4140 5195,4115 5215,4095 5215,4075 5230,4060 5230,4040 5245,4025 5245,4000 5260,3985 5260,3965 5275,3950 5275,3925 5270,3930 5240,3930 5080,4090 5080,4279.03 5084.34,4279.03
GND on Top Layer "GND_L01_P003" (solid, pour order 3): 4619.54,4704.88 4639.54,4684.88 4659.54,4684.88 4684.54,4659.88 4699.54,4659.88 4724.54,4634.88 4744.54,4634.88 4784.54,4594.88 4804.54,4594.88 4874.54,4524.88 4889.54,4524.88 5034.54,4379.88 5034.54,4369.88 5115,4289.42 5115,3545.6 4744.54,3776.34 4744.54,4579.88
GND on Top Layer "GND_L01_P002" (solid, pour order 2): 3422.99,4662.99 3515,4755 3560,4755 3555,4760 3575,4760 3595,4780 3635,4780 3645,4790 3660,4790 3670,4800 3700,4800 3715,4815 3745,4815 3750,4820 3780,4820 3790,4830 3960,4830 3975,4845 4090,4845 4095,4840 4160,4840 4170,4830 4215,4830 4220,4825 4240,4825 4245,4820 4275,4820 4280,4815 4320,4815 4330,4805 4355,4805 4365,4795 4385,4795 4395,4785 4420,4785 4430,4775 4455,4775 4475,4755 4540.92,4755 4638.82,4657.09
GND on Top Layer "GND_L01_P000" (solid, pour order 0): 3640,2540 3640,2260 3635,2255 3620,2255 3605,2270 3570,2270 3518.55,2296.45 3426.79,2338.21 3355,2375 3330,2375 2807.18,2993.12 2807.18,3790 5270,3790 5270,3080 5219.29,2963.01 5170,2825 5005,2660 4980,2660 4700,2380 4586.13,2325 4470,2285 4430,2325 4430,2540 3685,2540 4430,2540 3685,2540
GND on Bottom Layer "GND_L02_P008" (solid, pour order 8): 2850,3970 3170,4460 3355,4645 3400,4645 3490,4735 3735,4735 3815,4815 4080,4815 4090,4805 4335,4805 4415,4725 4510,4725 4510,4710 4540,4680 4500,4640 3485,4640 3485,3720 3405,3640 2850,3640 2850,3905 2805,3950 2825,3970
GND on Bottom Layer "GND_L02_P001" (solid, pour order 1): 3690,2530 3685,2525 3685,2245 3680,2240 3470,2355 2801.49,3006.41 2774.6,3974.58 3312.88,3755 4740,3755 4740,4605.39 5225,3940 5225,2940 5080,2795 5080,2730 4920,2570 4870,2570 4870,2550 4705,2385 4525,2385 4525,2355 4455,2285 4450,2290 4430,2290 4430,2515 4410,2535 4405,2530

## Silkscreen, mask and mechanical layers (free items; w line width, h text height)
Mechanical 1:
  circle w10: c4020,3520 r1322.32